# Altium PCB f446.pcbdoc (part 2 of 2)
Units mil, origin at the board's own origin, x right, y up, seen from the top; angles counter-clockwise.
Board outline 2178.76 x 2196.35 mil, 2 copper layers (Top Layer, Bottom Layer); 68 components, 82 nets, 319 pads, 182 vias.
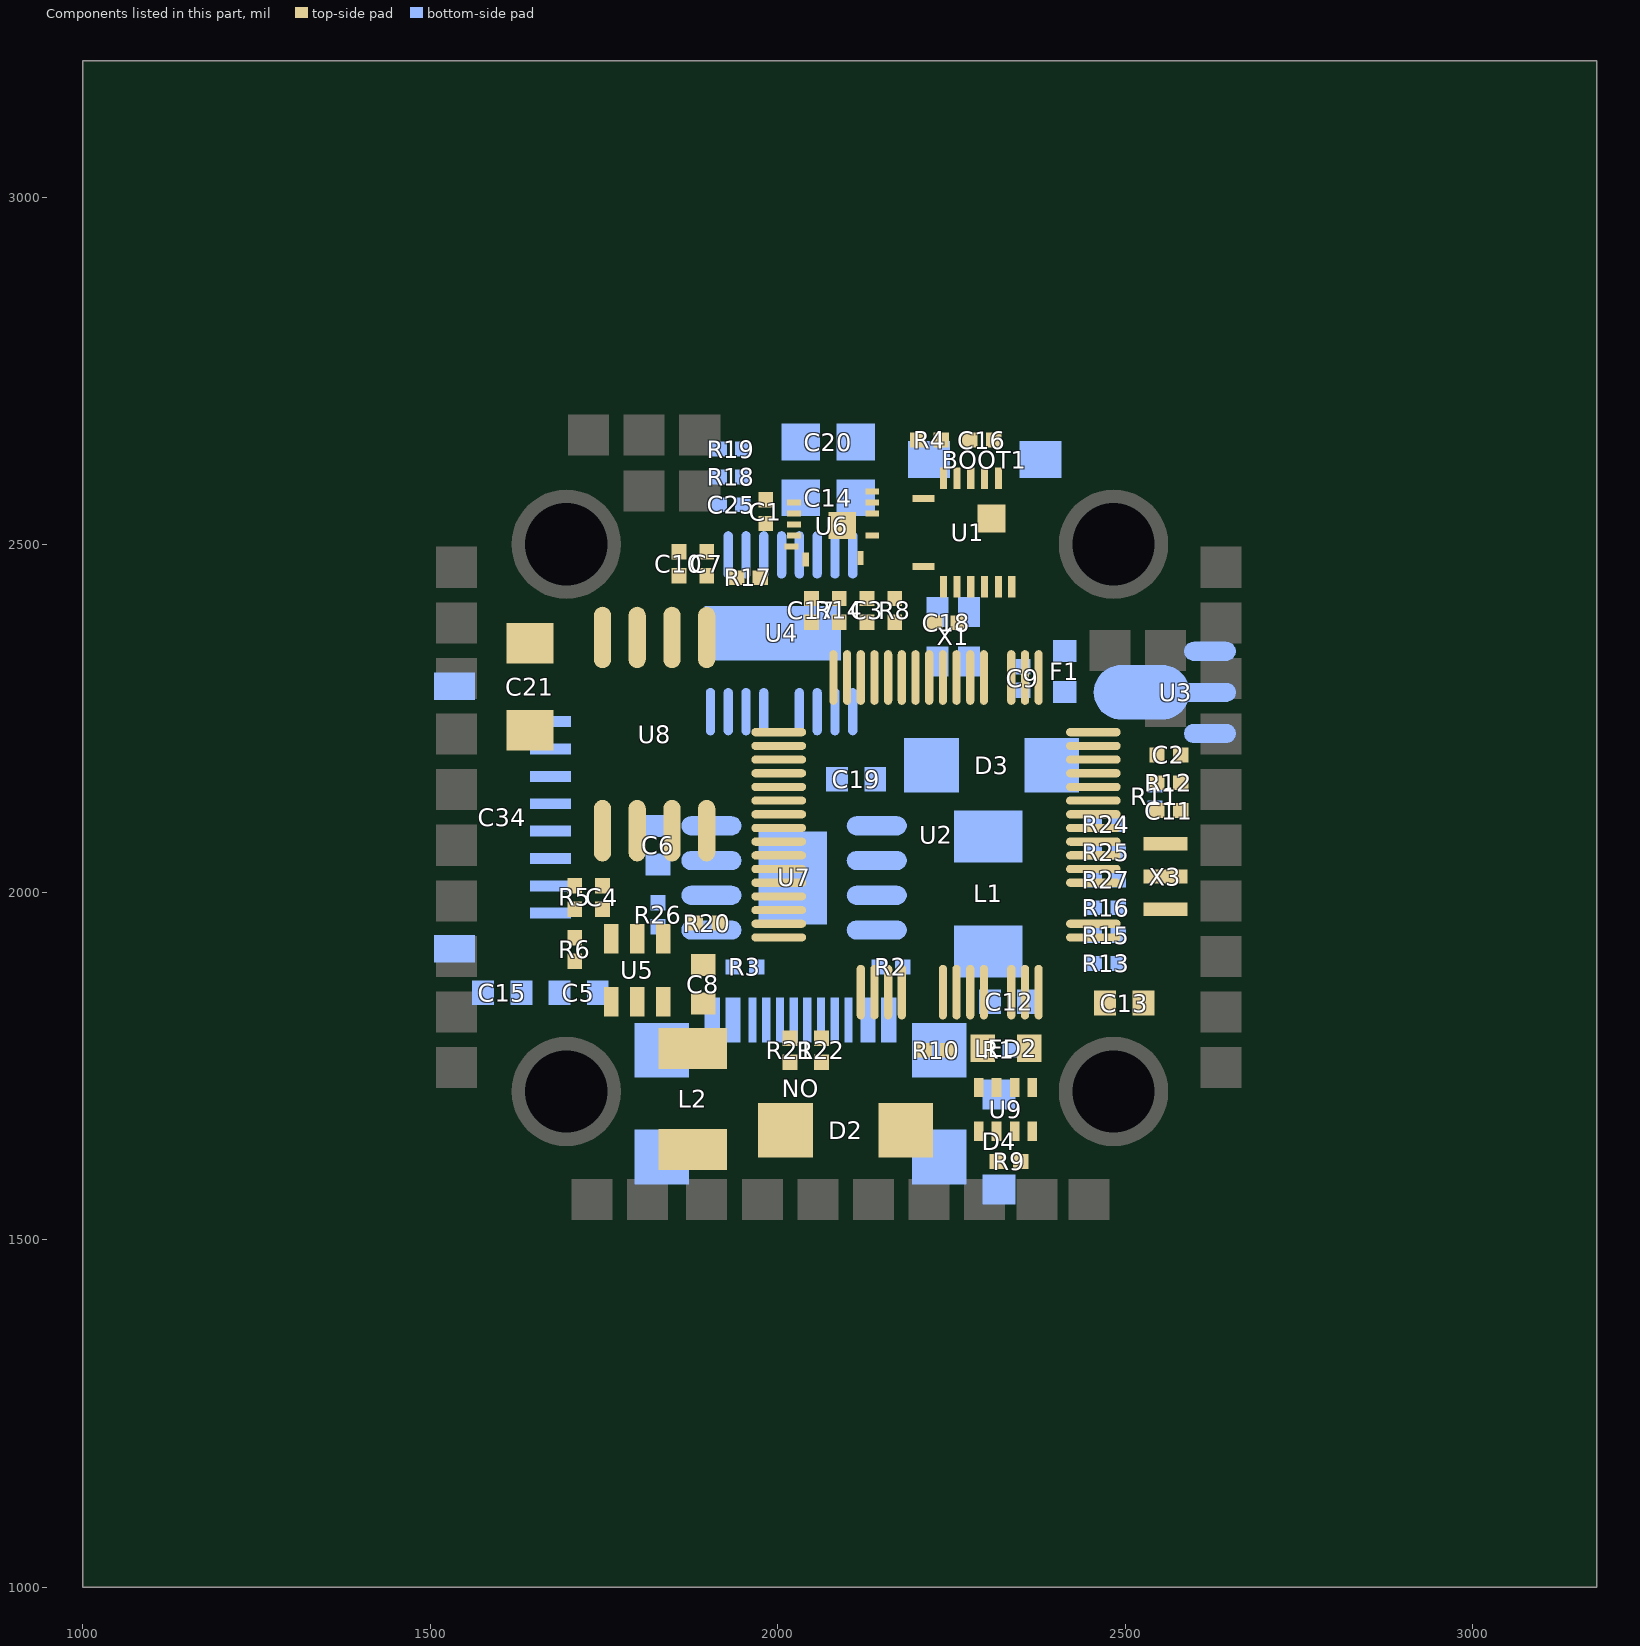
[diagram p2: the components of this part, seen from the top]

## Other copper
Top Layer:
  region net LED1: 2334.45,1783.52 2321.01,1783.52 2324.74,1789.79 2330.72,1789.79
  region net SPI_MISO1: 2284.05,2268.94 2270.64,2268.08 2273.95,2274.58 2279.93,2274.96
  region net GYRO_EXTL2: 2244.45,2248.52 2231.01,2248.52 2234.74,2254.79 2240.72,2254.79
  region net GYRO-CS2: 2224.52,2263.43 2211.09,2263.61 2214.9,2269.83 2220.88,2269.75
  region net S7: 2184.44,2258.52 2171.01,2258.53 2174.74,2262.61 2180.72,2262.6
  region net S8: 2143.65,2215.88 2143.65,2229.32 2149.92,2225.59 2149.92,2219.61
  region net GYRO_EXTL1: 2263.72,2568.2 2261.54,2554.94 2255.95,2559.59 2256.94,2565.58
  region net GYRO_EXTL2: 2172.55,2448.89 2172.55,2462.32 2166.28,2458.6 2166.28,2452.61
  region net 3V3_1: 2364.43,2613.51 2350.99,2613.51 2352.71,2619.78 2362.71,2619.78
  region net 3V3_1: 2364.44,2601.67 2351,2601.65 2352.73,2595.38 2362.73,2595.4
  region net 3V3_2: 1986.67,2443.16 1977.17,2433.66 1982.81,2430.44 1989.89,2437.51
  region net USB_DETECT: 1961.17,1966.02 1957.07,1978.81 1964.13,1977.32 1966.05,1971.34
  region net SPI_MISO1: 2167.55,2613.89 2167.55,2627.32 2161.28,2623.6 2161.28,2617.61
  region net GYRO-CS2: 2178.28,2521.54 2168.78,2512.04 2166.98,2519.11 2171.22,2523.34
  region net SPI_MOSI2: 1956.66,2308.15 1947.15,2298.66 1954.21,2296.85 1958.45,2301.08
  region net SPI_MOSI2: 1941.8,2300.88 1941.8,2314.32 1935.53,2310.59 1935.53,2304.61
  region net SPI_SCK2: 1928.29,2276.54 1918.78,2267.04 1916.99,2274.11 1921.22,2278.34
  region net S3: 1756.66,2187.04 1747.16,2196.54 1754.23,2198.34 1758.46,2194.11
  region net S2: 1778.65,2184.31 1778.64,2170.88 1784.91,2174.59 1784.92,2180.58
  region net S1: 1783.65,2159.31 1783.64,2145.88 1789.91,2149.59 1789.92,2155.58
  region net S4: 2041.8,2140.88 2041.8,2154.32 2035.53,2150.59 2035.53,2144.61
  region net U3_RX: 2099.44,1628.52 2086.01,1628.53 2089.74,1634.79 2095.72,1634.79
  region net U3_TX: 2079.44,1643.52 2066.01,1643.53 2069.74,1649.79 2075.72,1649.79
  region net S6: 1958.65,2065.88 1958.65,2079.32 1964.92,2075.59 1964.92,2069.61
  region net U1_TX: 2226.81,1955.88 2226.79,1969.31 2220.53,1965.58 2220.53,1959.59
  region net U1_RXPPM: 2206.81,1935.88 2206.79,1949.31 2200.53,1945.58 2200.53,1939.59
  region net SPI_SCK2: 1949.67,2218.25 1947.46,2205 1954.25,2207.6 1955.25,2213.58
  region net SPI_MISO2: 1955.23,2182.72 1951.63,2195.66 1958.64,2193.86 1960.3,2187.88
  region net U2_RX: 2366.66,2247.04 2357.16,2256.54 2364.23,2258.34 2368.46,2254.11
  region net VBAT+: 1666.8,2000.88 1666.8,2014.32 1660.53,2013.7 1660.53,2001.5
  region net VBAT+: 1653.65,2000.88 1653.65,2014.32 1659.92,2013.7 1659.92,2001.5
  region net VBAT+: 1641.8,2000.88 1641.8,2014.32 1635.53,2013.7 1635.53,2001.5
  region net VBAT+: 1629.44,2013.52 1616.01,2013.52 1616.62,2019.79 1628.83,2019.79
  region net VBAT+: 1628.65,2000.88 1628.65,2014.32 1634.92,2013.7 1634.92,2001.5
  region net VBAT+: 1629.44,2001.67 1616.01,2001.67 1616.62,1995.4 1628.83,1995.4
  region net S1: 1594.44,1986.67 1581.01,1986.67 1584.73,1980.4 1590.71,1980.4
  region net S6: 1594.44,2248.52 1581.01,2248.52 1584.73,2254.79 1590.71,2254.79
  region net OSDCS: 2145.09,2267.7 2131.74,2269.27 2136.16,2275.06 2142.14,2274.36
  region net VBAT+: 1629.44,2261.67 1616.01,2261.67 1616.62,2255.4 1628.83,2255.4
  region net VBAT+: 1629.44,2273.52 1616.01,2273.53 1616.63,2279.8 1628.83,2279.79
  region net VBAT+: 1629.44,2301.68 1616.01,2301.67 1616.63,2295.4 1628.83,2295.41
  region net VBAT+: 1629.44,2301.68 1616.01,2301.67 1616.63,2295.4 1628.83,2295.41
  region net VBAT+: 1629.44,2293.52 1616.01,2293.53 1616.63,2299.8 1628.83,2299.79
  region net VBAT+: 1629.44,2293.52 1616.01,2293.53 1616.63,2299.8 1628.83,2299.79
  region net VBAT+: 1629.44,2281.68 1616.01,2281.67 1616.63,2275.4 1628.83,2275.41
  region net ADC_BAT: 2543.29,2143.66 2533.78,2153.16 2531.99,2146.09 2536.22,2141.86
  region net C4_1: 1734.42,2026.65 1720.99,2026.7 1724.69,2020.41 1730.68,2020.4
  region net ADC_CURRENT: 2408.74,2099.24 2408.56,2085.8 2414.88,2089.45 2414.96,2095.43
  region net GYRO-CS1: 2384.43,2111.67 2371,2111.68 2374.72,2105.41 2380.7,2105.4
  region net GYRO_EXTL1: 2349.44,2126.68 2336.01,2126.67 2339.74,2120.4 2345.72,2120.41
  region net ADC-RSSI1: 2514.04,2141.67 2504.54,2151.17 2502.74,2144.1 2506.97,2139.87
  region net U1_TX: 2622.27,1963.88 2614.09,1974.54 2621.32,1975.42 2624.99,1970.64
  region net 3V3_1: 2364.44,2416.68 2351.01,2416.67 2352.73,2410.4 2362.73,2410.41
  region net 3V3_1: 2364.44,2428.52 2351.01,2428.53 2352.73,2434.8 2362.73,2434.79
  region net 3V3_1: 2358.28,2393.66 2348.78,2403.16 2345.57,2397.51 2352.64,2390.44
  region net 3V3_1: 2364.44,2408.52 2351.01,2408.53 2352.73,2414.8 2362.73,2414.79
  region net VBAT+: 1791.8,1835.64 1791.8,1849.08 1785.53,1848.46 1785.53,1836.26
  region net 3V3_2: 1881.8,2445.88 1881.8,2459.32 1875.53,2457.6 1875.53,2447.6
  region net 3V3_2: 1863.65,2445.88 1863.65,2459.32 1869.92,2457.6 1869.92,2447.6
  region net 3V3_2: 1851.8,2445.88 1851.8,2459.32 1845.53,2457.6 1845.53,2447.6
  region net R4_2: 2303.32,1965.31 2289.89,1965.31 2293.61,1959.04 2299.6,1959.04
  region net 3V3_1: 2103.65,1905.88 2103.65,1919.32 2109.92,1917.6 2109.92,1907.6
  region net 3V3_2: 2010.19,2311.53 1996.76,2311.53 1998.48,2317.8 2008.48,2317.8
  region net C16_1: 2270.25,2639.98 2285.21,2639.98 2280.72,2631 2274.74,2631
  region net 3V3_2: 1887.09,2444.42 1887.09,2465.1 1872.09,2457.6 1872.09,2447.6
  region net SCL: 2236.68,1587.13 2247.25,1576.54 2250.42,1586.06 2246.19,1590.3
  region net SDA: 2290.24,1587.13 2305.2,1587.13 2300.72,1594.63 2294.73,1594.63
  region net U5_TX: 2076.67,1587.13 2087.25,1576.55 2090.42,1586.07 2086.19,1590.3
  region net U5_RX: 2125.23,1587.13 2140.19,1587.13 2135.7,1596.1 2129.72,1596.1
  region net U2_RX: 2608.2,2460.11 2608.2,2475.07 2599.22,2470.58 2599.22,2464.59
  region net U2_TX: 2608.2,2385.11 2608.2,2400.07 2599.22,2395.58 2599.22,2389.59
  region net U4_RX: 2538.77,2318.07 2528.19,2328.65 2525.02,2319.13 2529.25,2314.9
  region net U4_TX: 2538.77,2238.07 2528.19,2248.65 2525.02,2239.13 2529.25,2234.9
  region net S1: 1567.25,1936.86 1567.25,1921.9 1576.23,1934.13 1576.23,1942.59
  region net S6: 1567.25,2294.31 1567.25,2279.35 1576.23,2273.63 1576.23,2282.09
  region net C4_1: 1971.74,1618.23 1971.74,1645.02 1953.43,1635.87 1953.43,1623.66
  region net U2_47: 1926.65,1963.72 1919.18,1944.98 1929.7,1938.68 1932.96,1946.84
  region net C4_1: 1718.35,2017.12 1718.35,2002.16 1727.33,2006.65 1727.33,2012.63
  region net C4_2: 1718.35,1968.08 1718.35,1983.04 1727.33,1978.55 1727.33,1972.57
  region net C4_2: 1700.25,1964.42 1715.21,1964.42 1710.72,1955.45 1704.74,1955.45
  region net C4_2: 1700.25,1945.77 1715.21,1945.77 1710.72,1954.75 1704.74,1954.75
  region net C4_2: 1758.35,1976.19 1749.12,1964.42 1757.93,1961.12 1761.66,1965.86
  region net C4_2: 1737.09,1968.08 1737.09,1983.04 1728.12,1978.55 1728.12,1972.57
  region net C4_1: 1737.09,2017.12 1737.09,2002.16 1728.12,2006.65 1728.12,2012.63
  region net 3V3_1: 2338.63,1623.23 2360.9,1623.23 2354.77,1627.6 2344.77,1627.6
  region net SDA: 2316.32,1601.97 2304.55,1611.21 2301.25,1602.39 2305.99,1598.67
  region net SDA: 2323.17,1623.23 2308.21,1623.23 2312.7,1632.21 2318.68,1632.21
  region net 3V3_1: 2199.55,1783.23 2221.82,1783.23 2215.68,1798.23 2205.68,1798.23
  region net SCL: 2237.29,1761.97 2252.25,1761.97 2247.76,1752.99 2241.78,1752.99
  region net SCL: 2252.25,1783.23 2237.29,1783.23 2241.78,1792.21 2247.76,1792.21
  region net 3V3_1: 2333.82,1669.88 2347.62,1669.88 2345.73,1674.59 2335.73,1674.59
  region net 3V3_1: 2347.62,1642.32 2333.82,1642.32 2335.73,1636.64 2345.73,1636.64
  region net SDA: 2321.62,1642.32 2308.21,1642.32 2312.7,1633.34 2318.68,1633.34
  region net SDA: 2307.82,1669.88 2321.62,1669.88 2317.7,1675.59 2311.72,1675.59
  region net SCL: 2296.02,1642.32 2282.22,1642.32 2286.14,1633.34 2292.12,1633.34
  region net SCL: 2282.22,1656.03 2287.88,1669.88 2280.07,1674.49 2277.61,1668.48
  region net 3V3_1: 2373.22,1705.32 2359.42,1705.32 2361.33,1700.19 2371.33,1700.19
  region net 3V3_1: 2359.42,1732.88 2373.22,1715.77 2379.31,1732.12 2372.99,1739.94
  region net 3V3_1: 2321.62,1705.32 2307.82,1705.32 2309.73,1700.59 2319.73,1700.59
  region net 3V3_1: 2033.42,2565.02 2013.54,2565.02 2018.48,2575.61 2028.48,2575.61
  region net SPI_MISO1: 2033.42,2540.45 2033.42,2549.27 2037.73,2547.85 2037.73,2541.87
  region net U6_10: 2013.54,2533.52 2013.54,2524.71 2004.56,2526.13 2004.56,2532.11
  region net GYRO_EXTL2: 2029.5,2493.21 2029.5,2502.03 2038.48,2500.61 2038.48,2494.63
  region net 3V3_1: 2035.9,2488.78 2035.9,2468.89 2020.9,2473.84 2020.9,2483.84
  region net GYRO-CS2: 2145.83,2549.27 2145.48,2540.45 2154.13,2531.96 2154.45,2540.1
  region net SPI_SCK1: 2145.83,2556.2 2145.83,2565.02 2154.71,2563.58 2154.71,2557.6
  region net SPI_MOSI1: 2145.83,2571.95 2145.83,2580.77 2154.8,2579.38 2154.8,2573.4
  region net C16_1: 2272.62,2611.15 2282.82,2611.15 2280.72,2620.13 2274.74,2620.13
  region net GYRO_EXTL1: 2243.82,2580.05 2233.62,2580.05 2235.72,2576.59 2241.7,2576.59
  region net C18_1: 2262.82,2424.05 2252.62,2424.05 2254.74,2415.07 2260.72,2415.07
  region net SPI_SCK1: 2322.82,2424.05 2312.62,2424.05 2314.72,2415.07 2320.7,2415.07
  region net SPI_SCK1: 2312.62,2451.48 2322.82,2455.15 2313.27,2461.25 2307.05,2459.02
  region net SPI_MOSI1: 2341.82,2424.05 2331.62,2424.05 2333.72,2415.07 2339.7,2415.07
  region net SPI_MOSI1: 2331.62,2453.79 2341.82,2455.15 2331.68,2462.85 2324.21,2461.85
  region net 3V3_2: 1985.9,2441.97 1965.86,2441.97 1986.29,2426.97 2000.43,2426.97
  region net U6_10: 1993.35,2536.6 1993.35,2521.64 2002.33,2526.13 2002.33,2532.11
  region net 3V3_1: 2550,2186.97 2534.55,2199.94 2530.18,2187.81 2536.38,2182.6
  region net C18_1: 2265.21,2398.23 2250.25,2398.23 2254.74,2407.21 2260.72,2407.21
  region net U2_31: 2099.11,2389.21 2089.88,2377.43 2097.66,2375.16 2101.64,2379.65
  region net ADC_BAT: 2549.07,2146.97 2534.55,2150.57 2528.68,2142.78 2535.46,2141.1
  region net C11_1: 2546.29,2106.97 2534.55,2116.24 2531.25,2107.4 2535.98,2103.67
  region net 3V3_1: 2037.85,2377.43 2037.85,2399.7 2030.52,2393.57 2030.52,2383.57
  region net 3V3_1: 2059.11,2396.35 2042.76,2377.43 2057.93,2372.05 2064.49,2379.64
  region net USB_DP: 2010.25,1800.77 2025.21,1800.77 2020.72,1809.75 2014.74,1809.75
  region net USB_DM: 2055.23,1800.77 2070.19,1800.77 2065.7,1809.75 2059.72,1809.75
  region net C8_2: 1875.01,1887.68 1875.01,1902.64 1866.03,1898.15 1866.03,1892.17
  region net C8_1: 1907.98,1824.29 1877.47,1824.29 1886.63,1805.98 1898.83,1805.98
  region net C8_1: 1875.01,1824.78 1875.01,1855.29 1856.7,1846.14 1856.7,1833.94
  region net C8_2: 1845.59,1916.76 1831.5,1911.74 1844.32,1906.77 1850.56,1908.99
  region net C4_2: 1752.85,1953.94 1767.81,1953.94 1763.32,1962.92 1757.34,1962.92
  region net VBAT+: 1749.85,1827.13 1749.85,1857.64 1731.54,1848.54 1731.54,1836.34
  region net VBAT+: 1770.79,1857.61 1770.79,1827.1 1789.1,1836.26 1789.1,1848.46
  region net VBAT+: 1787.25,1827.1 1787.25,1857.61 1768.94,1848.46 1768.94,1836.26
  region net C8_1: 1845.59,1855.29 1845.59,1824.78 1863.9,1833.94 1863.9,1846.14
  region net C8_1: 1877.47,1804.96 1907.98,1804.96 1898.83,1823.27 1886.63,1823.27
  region net C4_1: 1926.94,1645.02 1926.94,1614.51 1945.24,1623.66 1945.24,1635.87
  region net X3_1: 2541.17,2059.95 2526.23,2060.66 2517.95,2052.06 2526.04,2051.68
  region net X3_3: 2526.23,1984.49 2541.17,1985.24 2526.06,1993.47 2518,1993.07
  region net 3V3_2: 1868.35,2444.42 1868.35,2465.1 1883.35,2457.6 1883.35,2447.6
  region net 3V3_2: 1847.09,2465.1 1847.09,2444.42 1832.09,2447.6 1832.09,2457.6
  region net 3V3_1: 2381.27,1889.67 2369.46,1889.71 2370.41,1904.71 2380.41,1904.68
  region net 3V3_1: 2381.27,1839.06 2373.36,1817.21 2383.18,1810.1 2388,1819.42
  region net LED1: 2341.9,1822.76 2330.09,1822.76 2333.01,1813.79 2338.99,1813.79
  region net R4_2: 2302.53,1889.71 2290.72,1889.68 2293.61,1898.66 2299.6,1898.67
  region net SDA: 2282.84,1822.73 2271.03,1822.79 2273.92,1816.8 2279.9,1816.77
  region net SCL: 2262.85,1820.87 2251.66,1824.65 2251.22,1815.33 2257.55,1813.19
  region net U5_RX: 2184.42,1822.76 2172.61,1822.77 2175.52,1813.79 2181.5,1813.78
  region net U5_TX: 2164.73,1822.75 2152.92,1822.78 2155.81,1813.79 2161.8,1813.78
  region net U3_RX: 2145.05,1822.76 2133.24,1822.76 2136.16,1813.79 2142.14,1813.79
  region net U3_TX: 2125.25,1821.62 2113.66,1823.9 2114.73,1814.55 2120.72,1813.37
  region net U2_47: 1970.55,1949.37 1965.24,1959.92 1955.17,1953.01 1958.99,1945.41
  region net USB_DETECT: 1967.89,1968.42 1967.89,1980.23 1958.92,1977.32 1958.92,1971.34
  region net USB_DP: 2034.82,1988.11 2034.82,1999.92 2041.3,1997.01 2041.3,1991.03
  region net USB_DM: 2034.83,2019.6 2034.82,2007.79 2043.8,2010.7 2043.8,2016.68
  region net U1_RXPPM: 2034.82,2027.48 2034.82,2039.29 2043.8,2036.38 2043.8,2030.4
  region net U1_TX: 2034.84,2047.16 2034.81,2058.97 2043.79,2056.08 2043.81,2050.1
  region net S6: 1968,2066.85 1967.79,2078.66 1958.87,2075.59 1958.97,2069.61
  region net S1: 1967.93,2086.53 1967.86,2098.34 1958.9,2095.38 1958.93,2089.4
  region net S2: 1967.92,2106.22 1967.87,2118.03 1958.9,2115.08 1958.93,2109.1
  region net S3: 1967.91,2125.9 1967.88,2137.71 1958.91,2134.78 1958.92,2128.8
  region net SPI_MOSI2: 2034.83,2165.27 2034.82,2177.08 2043.8,2174.18 2043.8,2168.2
  region net SPI_MISO2: 1967.89,2184.96 1967.89,2196.77 1958.92,2193.86 1958.92,2187.88
  region net SPI_SCK2: 1967.92,2216.45 1967.87,2204.64 1958.9,2207.6 1958.93,2213.58
  region net FLASH_CS: 1967.89,2224.33 1967.89,2236.14 1958.92,2233.23 1958.92,2227.25
  region net 3V3_1: 2085.99,2342.43 2074.18,2342.44 2075.11,2356.95 2085.11,2356.94
  region net U2_31: 2105.68,2342.43 2093.87,2342.43 2096.79,2351.41 2102.77,2351.41
  region net C3_1: 2125.36,2342.43 2113.55,2342.43 2116.47,2351.41 2122.45,2351.41
  region net OSDCS: 2145.05,2275.5 2133.24,2275.5 2136.16,2266.53 2142.14,2266.53
  region net U2_28: 2164.73,2342.43 2152.92,2342.43 2155.84,2351.41 2161.82,2351.41
  region net S7: 2184.42,2275.5 2172.61,2275.5 2175.53,2266.53 2181.51,2266.53
  region net S8: 2204.1,2275.5 2192.29,2275.5 2195.21,2266.53 2201.19,2266.53
  region net GYRO-CS2: 2223.79,2275.5 2211.98,2275.5 2214.9,2266.53 2220.88,2266.53
  region net GYRO_EXTL2: 2243.47,2275.61 2231.66,2275.4 2234.74,2266.47 2240.72,2266.58
  region net SPI_MOSI1: 2263.16,2275.53 2251.35,2275.47 2254.32,2266.51 2260.3,2266.54
  region net SPI_MISO1: 2282.84,2275.5 2271.03,2275.5 2273.95,2266.53 2279.93,2266.53
  region net SPI_SCK1: 2302.53,2342.45 2290.72,2342.42 2293.61,2351.4 2299.6,2351.42
  region net 3V3_1: 2341.9,2275.51 2330.09,2275.5 2331.01,2260.5 2341.01,2260.51
  region net 3V3_1: 2341.9,2342.43 2330.09,2342.44 2331.01,2357.44 2341.01,2357.43
  region net U2_RX: 2381.27,2275.5 2369.46,2275.5 2372.37,2266.53 2378.36,2266.53
  region net U2_RX: 2381.27,2342.41 2369.46,2342.46 2372.42,2351.42 2378.4,2351.4
  region net U2_TX: 2422.59,2235.81 2418.68,2224.67 2411.07,2230.08 2413.26,2236.34
  region net U4_RX: 2487.59,2204.64 2487.54,2216.45 2496.53,2213.58 2496.55,2207.6
  region net U4_TX: 2487.57,2184.96 2487.55,2196.77 2496.53,2193.88 2496.54,2187.9
  region net 3V3_1: 2487.56,2165.27 2487.56,2177.08 2499.67,2175.21 2499.67,2167.14
  region net 3V3_1: 2420.64,2177.08 2420.63,2165.27 2405.63,2166.19 2405.64,2176.19
  region net ADC-RSSI1: 2487.56,2125.9 2487.56,2137.71 2494.68,2134.8 2494.68,2128.82
  region net ADC_BAT: 2487.59,2118.03 2487.54,2106.22 2496.53,2109.1 2496.55,2115.08
  region net ADC_CURRENT: 2420.63,2086.53 2420.63,2098.34 2411.66,2095.43 2411.66,2089.45
  region net GYRO-CS1: 2420.65,2078.66 2420.61,2066.85 2411.65,2069.79 2411.67,2075.78
  region net C11_1: 2487.56,2047.16 2487.56,2058.97 2496.54,2056.06 2496.54,2050.08
  region net X3_1: 2487.56,2027.48 2487.56,2039.29 2496.54,2036.38 2496.54,2030.4
  region net X3_3: 2487.57,2019.6 2487.56,2007.79 2496.53,2010.7 2496.54,2016.68
  region net GYRO_EXTL1: 2420.63,1948.74 2420.63,1960.55 2411.66,1957.64 2411.66,1951.66
  region net 3V3_1: 2420.65,1940.86 2420.62,1929.05 2405.62,1929.99 2405.64,1939.99
  region net FLASH_CS: 1755.2,2130.4 1740.24,2130.4 1744.73,2139.38 1750.71,2139.38
  region net 3V3_2: 1744.06,2410.32 1760.12,2391.16 1765.65,2408.46 1759.45,2416.4
  region net SPI_SCK2: 1860.12,2342.68 1858.07,2327.86 1869.1,2321.99 1869.1,2330.46
  region net SPI_MOSI2: 1910.12,2337 1903.37,2323.65 1915.33,2315.76 1916.65,2322.9
Mid-Layer 1:
  region net R4_2: 2240.2,2634.68 2226.76,2634.68 2229.44,2628.41 2237.51,2628.41
  region net GYRO_EXTL2: 2244.45,2248.52 2231.01,2248.52 2233.69,2254.79 2241.76,2254.79
  region net GYRO-CS2: 2224.45,2263.52 2211.01,2263.52 2213.69,2269.79 2221.76,2269.79
  region net S7: 2178.29,2243.66 2168.78,2253.16 2166.25,2246.83 2171.96,2241.12
  region net S8: 2131.8,2215.88 2131.8,2229.32 2125.53,2226.63 2125.53,2218.56
  region net GYRO_EXTL1: 2277.42,2561.17 2267.92,2551.67 2274.25,2549.13 2279.95,2554.84
  region net GYRO-CS1: 2331.67,2588.14 2322.15,2578.66 2328.48,2576.11 2334.19,2581.81
  region net GYRO_EXTL2: 2187.42,2456.17 2177.92,2446.67 2184.25,2444.13 2189.95,2449.84
  region net USB_DETECT: 1976.48,1898.53 1963.05,1898.53 1965.73,1904.8 1973.8,1904.8
  region net USB_DETECT: 1960.19,1964.68 1946.76,1964.68 1949.44,1958.41 1957.51,1958.41
  region net GYRO-CS2: 2178.29,2521.54 2168.78,2512.04 2166.25,2518.37 2171.96,2524.08
  region net S4: 1706.66,2167.04 1697.16,2176.54 1703.49,2179.08 1709.2,2173.37
  region net S4: 2041.8,2140.88 2041.8,2154.32 2035.53,2151.63 2035.53,2143.56
  region net S6: 1946.8,2065.88 1946.8,2079.32 1940.53,2076.63 1940.53,2068.56
  region net S5: 2233.28,1891.54 2223.78,1882.04 2221.25,1888.37 2226.95,1894.08
  region net U1_TX: 2241.66,1963.15 2232.15,1953.66 2238.47,1951.11 2244.19,1956.81
  region net U1_RXPPM: 2221.66,1943.16 2212.16,1933.66 2218.5,1931.12 2224.2,1936.83
  region net U2_RX: 1708.65,2254.31 1708.64,2240.88 1714.91,2243.55 1714.92,2251.62
  region net S8: 1544.44,2441.68 1531.01,2441.67 1533.69,2435.4 1541.76,2435.41
  region net S7: 1571.66,2408.16 1562.16,2398.66 1568.5,2396.12 1574.2,2401.83
  region net S6: 1594.44,2236.68 1581.01,2236.67 1583.69,2230.4 1591.76,2230.41
  region net S5: 1566.66,2208.16 1557.16,2198.66 1563.5,2196.12 1569.2,2201.83
  region net GYRO-CS1: 2384.43,2123.53 2371,2123.52 2373.67,2129.79 2381.74,2129.8
  region net GYRO_EXTL1: 2349.44,2138.52 2336.01,2138.53 2338.69,2144.8 2346.76,2144.79
  region net R4_2: 2306.66,2172.04 2297.16,2181.54 2303.5,2184.07 2309.2,2178.37
  region net U2_RX: 2281.8,2195.88 2281.8,2209.32 2275.53,2206.63 2275.53,2198.56
  region net ADC-RSSI1: 2520.2,2156.53 2506.76,2156.53 2509.44,2162.8 2517.52,2162.8
  region net ADC-RSSI1: 2511.66,2348.16 2502.16,2338.66 2508.49,2336.12 2514.2,2341.83
  region net U1_TX: 2614.07,1956.67 2604.54,1966.14 2602.02,1959.81 2607.74,1954.11
  region net U1_RXPPM: 2612.56,1913.89 2612.56,1927.32 2606.29,1924.64 2606.29,1916.57
  region net VBAT+: 2537.56,1893.88 2537.55,1907.32 2531.28,1904.63 2531.29,1896.56
  region net VBAT+: 1803.67,1835.65 1803.63,1849.09 1809.91,1846.42 1809.93,1838.35
Mid-Layer 2:
  region net SPI_MISO1: 2283.65,2255.88 2283.65,2269.32 2289.92,2266.63 2289.92,2258.56
  region net SPI_MISO1: 2298.29,2581.54 2288.79,2572.04 2286.25,2578.37 2291.96,2584.08
  region net SPI_MISO1: 2304.45,2566.67 2291.01,2566.67 2293.69,2560.4 2301.76,2560.4
  region net SPI_MISO1: 2179.4,2613.89 2179.4,2627.32 2185.67,2624.64 2185.67,2616.57
  region net U2_RX: 2358.29,2238.66 2348.78,2248.16 2346.25,2241.83 2351.96,2236.12
  region net OSDCS: 1985.88,2260.66 1982.56,2247.64 1989.27,2248.56 1991.32,2256.63
  region net OSDCS: 2138.28,2253.66 2128.78,2263.16 2126.25,2256.83 2131.95,2251.12
  region net R4_2: 2303.87,2166.08 2290.49,2167.31 2292.57,2160.83 2300.64,2160.09
  region net U2_RX: 2293.65,2195.88 2293.65,2209.32 2299.92,2206.63 2299.92,2198.56
  region net R4_2: 2303.32,1977.16 2289.89,1977.16 2292.57,1983.43 2300.64,1983.43
Bottom Layer:
  region net 3V3_1: 2364.8,2613.06 2351.39,2613.94 2353.51,2620.08 2363.51,2619.43
  region net 3V3_1: 2364.8,2602.12 2351.39,2601.23 2353.51,2595.09 2363.51,2595.75
  region net 3V3_2: 1978.29,2433.66 1968.79,2443.16 1965.57,2437.51 1972.64,2430.44
  region net 3V3_2: 1986.67,2443.16 1977.17,2433.66 1982.81,2430.44 1989.89,2437.51
  region net 3V3_2: 1985.4,2447.22 1972.18,2449.63 1974.92,2455.51 1984.92,2453.68
  region net R22_1: 2063.28,1761.54 2053.78,1752.04 2051.98,1759.11 2056.22,1763.34
  region net R21_1: 2013.28,1761.54 2003.78,1752.04 2001.98,1759.11 2006.22,1763.34
  region net +5V: 2346.96,1565.74 2346.64,1579.17 2340.39,1578.41 2340.68,1566.21
  region net +5V: 2358.65,1565.88 2358.65,1579.32 2364.92,1578.7 2364.92,1566.5
  region net +5V: 2384.44,1578.52 2371.01,1578.52 2371.62,1584.79 2383.83,1584.79
  region net +5V: 2371.8,1565.88 2371.8,1579.32 2365.53,1578.7 2365.53,1566.5
  region net +5V: 2188.65,1675.88 2188.65,1689.32 2194.92,1688.7 2194.92,1676.5
  region net +5V: 2176.8,1675.88 2176.8,1689.32 2170.53,1688.7 2170.53,1676.5
  region net +5V: 2213.65,1675.88 2213.65,1689.32 2219.92,1688.7 2219.92,1676.5
  region net +5V: 2201.8,1675.88 2201.8,1689.32 2195.53,1688.7 2195.53,1676.5
  region net +5V: 2151.8,1675.88 2151.8,1689.32 2145.53,1688.7 2145.53,1676.5
  region net +5V: 2163.65,1675.88 2163.65,1689.32 2169.92,1688.7 2169.92,1676.5
  region net +5V: 1926.66,1582.04 1917.16,1591.54 1922.03,1595.54 1930.66,1586.91
  region net +5V: 1911.8,1575.88 1911.8,1589.32 1905.53,1588.7 1905.53,1576.5
  region net +5V: 1903.65,1575.88 1903.65,1589.32 1909.92,1588.7 1909.92,1576.5
  region net SPI_MOSI2: 1947.16,2298.66 1956.66,2308.16 1956.44,2303.11 1952.21,2298.88
  region net SPI_SCK2: 1934.91,2262.25 1921.52,2261.14 1925.75,2255.2 1931.73,2255.7
  region net S3: 1748.29,2178.66 1738.78,2188.16 1736.99,2181.09 1741.22,2176.86
  region net S2: 1773.29,2168.66 1763.78,2178.16 1761.99,2171.09 1766.22,2166.86
  region net S1: 1778.28,2143.66 1768.78,2153.16 1766.98,2146.09 1771.21,2141.86
  region net U3_RX: 2093.28,1613.66 2083.78,1623.16 2081.98,1616.09 2086.22,1611.86
  region net U3_TX: 2073.28,1628.66 2063.78,1638.16 2061.98,1631.09 2066.22,1626.86
  region net U3_TX: 1758.65,1550.88 1758.65,1564.32 1764.92,1560.59 1764.92,1554.61
  region net U3_RX: 1833.65,1535.88 1833.65,1549.32 1839.92,1545.59 1839.92,1539.61
  region net SPI_SCK2: 1943.29,2221.54 1933.78,2212.04 1931.99,2219.11 1936.22,2223.34
  region net SPI_MISO2: 1941.8,2180.88 1941.8,2194.32 1935.53,2190.59 1935.53,2184.61
  region net SPI_MISO2: 1806.67,2127.1 1797.1,2136.53 1804.15,2138.38 1808.42,2134.18
  region net VBAT+: 1666.8,2000.88 1666.8,2014.32 1660.53,2013.7 1660.53,2001.5
  region net VBAT+: 1678.65,2000.88 1678.65,2014.32 1684.92,2013.7 1684.92,2001.5
  region net VBAT+: 1641.8,2000.88 1641.8,2014.32 1635.53,2013.7 1635.53,2001.5
  region net VBAT+: 1653.65,2000.88 1653.65,2014.32 1659.92,2013.7 1659.92,2001.5
  region net VBAT+: 1628.65,2000.88 1628.65,2014.32 1634.92,2013.7 1634.92,2001.5
  region net S1: 1594.44,1998.52 1581.01,1998.52 1584.73,2004.79 1590.71,2004.79
  region net S2: 1571.66,2012.04 1562.16,2021.54 1569.23,2023.34 1573.46,2019.11
  region net S3: 1563.65,2094.31 1563.64,2080.88 1569.91,2084.59 1569.92,2090.58
  region net S4: 1563.65,2134.31 1563.64,2120.88 1569.91,2124.59 1569.92,2130.58
  region net VBAT+: 1794.44,2651.67 1781.01,2651.67 1781.62,2645.4 1793.83,2645.4
  region net VBAT+: 1796.66,2638.15 1787.15,2628.66 1792.01,2624.65 1800.65,2633.27
  region net VBAT+: 1794.44,2643.52 1781.01,2643.52 1781.62,2649.79 1793.83,2649.79
  region net VBAT+: 1629.44,2273.52 1616.01,2273.53 1616.63,2279.8 1628.83,2279.79
  region net VBAT+: 1631.66,2307.04 1622.16,2316.54 1627.03,2320.54 1635.66,2311.9
  region net VBAT+: 1629.44,2301.68 1616.01,2301.67 1616.63,2295.4 1628.83,2295.41
  region net VBAT+: 1629.44,2293.52 1616.01,2293.53 1616.63,2299.8 1628.83,2299.79
  region net VBAT+: 1629.44,2281.68 1616.01,2281.67 1616.63,2275.4 1628.83,2275.41
  region net 3V3_1: 2364.44,2416.67 2351.01,2416.67 2352.72,2410.4 2362.72,2410.4
  region net 3V3_1: 2364.44,2408.52 2351.01,2408.52 2352.72,2414.79 2362.72,2414.79
  region net 3V3_1: 2366.66,2403.13 2357.13,2393.66 2362.77,2390.42 2369.87,2397.47
  region net VBAT+: 2550.2,1906.53 2536.76,1906.53 2539.44,1912.8 2547.52,1912.8
  region net 3V3_2: 1896.66,2453.16 1887.16,2443.66 1892.81,2440.44 1899.88,2447.51
  region net 3V3_2: 1881.8,2445.88 1881.8,2459.32 1875.53,2457.6 1875.53,2447.6
  region net 3V3_2: 1863.65,2445.88 1863.65,2459.32 1869.92,2457.6 1869.92,2447.6
  region net 3V3_1: 2021.66,1928.16 2012.16,1918.66 2017.81,1915.44 2024.88,1922.51
  region net 3V3_1: 2091.8,1905.88 2091.8,1919.32 2085.53,1917.6 2085.53,1907.6
  region net 3V3_1: 2217.42,2571.17 2207.92,2561.67 2213.57,2558.45 2220.64,2565.53
  region net 3V3_2: 2010.19,2299.68 1996.76,2299.68 1998.48,2293.41 2008.48,2293.41
  region net +5V: 2635.2,2079.68 2621.76,2079.68 2622.38,2073.41 2634.58,2073.41
  region net +5V: 2635.2,2091.53 2621.76,2091.53 2622.38,2097.8 2634.58,2097.8
  region net +5V: 2635.2,2049.68 2621.76,2049.68 2622.38,2043.41 2634.58,2043.41
  region net +5V: 2635.2,2061.53 2621.76,2061.53 2622.38,2067.8 2634.58,2067.8
  region net R2_2: 2134.55,1900.08 2134.55,1885.12 2125.57,1889.61 2125.57,1895.59
  region net D4_2: 2294.85,1716.4 2294.85,1701.44 2285.88,1705.93 2285.88,1711.91
  region net +5V: 2342.1,1557.05 2342.1,1587.56 2352.43,1578.41 2352.43,1566.21
  region net +5V: 2333.73,1593.96 2303.22,1593.96 2312.37,1612.26 2324.58,1612.26
  region net R19_1: 2040.83,2594.17 2025.87,2594.17 2030.36,2603.15 2036.34,2603.15
  region net U4_25: 2097.38,2541.02 2084.34,2548.36 2080.49,2540.22 2085.91,2537.18
  region net R19_1: 2025.87,2621.02 2040.83,2621.02 2036.34,2612.05 2030.36,2612.05
  region net R19_1: 2005.6,2645.08 2005.6,2630.12 1996.62,2634.61 1996.62,2640.59
  region net U4_26: 2139.85,2628.39 2126.83,2621.02 2138.28,2617.19 2143.68,2620.24
  region net 3V3_1: 2347.72,2595.83 2371.01,2595.83 2363.51,2585.59 2353.51,2585.59
  region net VBAT+: 2532.09,2109.42 2553.35,2109.42 2548.83,2091.12 2536.63,2091.12
  region net C19_2: 2253.51,2095.53 2253.51,2065.02 2235.2,2074.17 2235.2,2086.38
  region net +9V: 2351.94,1897.34 2351.94,1927.85 2367.72,1918.7 2367.72,1906.5
  region net +9V: 2287.47,1877.52 2317.98,1877.52 2308.83,1859.21 2296.63,1859.21
  region net U7_6: 1825.41,1995.77 1838.35,1980.29 1841.29,1992.49 1835.83,1998.45
  region net 3V3_2: 2363.35,2300.44 2363.35,2279.42 2378.35,2282.94 2378.35,2292.94
  region net VBAT+: 1643.19,2017.04 1643.19,2001.29 1624.89,2001.5 1624.89,2013.7
  region net VBAT+: 1702.25,2001.29 1702.25,2017.04 1720.56,2013.7 1720.56,2001.5
  region net S1: 1643.19,2056.02 1643.19,2041.06 1634.22,2045.55 1634.22,2051.53
  region net S1: 1702.25,2041.11 1702.25,2056.07 1711.23,2051.58 1711.23,2045.6
  region net S2: 1643.19,2095.39 1643.19,2080.43 1638.03,2084.92 1638.03,2090.9
  region net S2: 1702.25,2080.43 1702.25,2095.39 1711.23,2090.9 1711.23,2084.92
  region net S3: 1656.46,2119.4 1643.19,2126.31 1639.18,2118.28 1644.74,2115.39
  region net S3: 1702.25,2119.8 1702.25,2134.76 1707.4,2130.27 1707.4,2124.29
  region net S4: 1655.36,2158.77 1643.19,2167.47 1639.78,2158.88 1644.71,2155.36
  region net VBAT+: 1835.85,2024.29 1810.01,2040.51 1802.6,2023.54 1813.21,2016.89
  region net VBAT+: 1845.44,2030.34 1845.44,2055.79 1863.75,2051.7 1863.75,2039.49
  region net +9V: 2317.98,1860.31 2289.42,1860.31 2296.63,1878.62 2308.83,1878.62
  region net C19_2: 2125.02,2144.88 2155.53,2144.88 2146.38,2126.57 2134.18,2126.57
  region net C19_1: 2069.91,2144.88 2100.43,2144.88 2091.27,2130.05 2079.07,2130.05
  region net C19_2: 2205.85,2143.23 2236.36,2143.23 2227.21,2124.92 2215.01,2124.92
  region net +9V: 2478.63,1886.97 2500.9,1886.97 2495.87,1881.9 2483.67,1881.9
  region net U7_4: 2445.59,1908.23 2465.77,1908.23 2459.71,1920.34 2451.64,1920.34
  region net U7_4: 2444.55,1947.69 2444.55,1927.51 2432.44,1933.56 2432.44,1941.63
  region net U7_4: 2445.59,1926.97 2465.77,1926.97 2459.71,1914.86 2451.64,1914.86
  region net U7_3: 2444.54,1987.69 2444.54,1967.51 2432.44,1973.56 2432.44,1981.63
  region net R27_2: 2479.67,1988.23 2499.85,1988.23 2493.79,2000.34 2485.72,2000.34
  region net U7_2: 2445.59,2086.97 2465.77,2086.97 2459.71,2074.86 2451.64,2074.86
  region net VBAT+: 2500.9,2046.97 2500.9,2068.23 2519.2,2063.7 2519.2,2051.5
  region net U7_2: 2444.55,2047.5 2444.55,2067.68 2432.44,2061.62 2432.44,2053.55
  region net U7_2: 2445.59,2068.23 2465.77,2068.23 2459.71,2080.34 2451.64,2080.34
  region net R27_2: 2479.67,2006.97 2499.85,2006.97 2493.79,1994.86 2485.72,1994.86
  region net C25_2: 1960.9,2550.12 1960.9,2565.08 1967.72,2560.59 1967.72,2554.61
  region net OSDIN: 1908.2,2568.23 1923.16,2568.23 1918.67,2577.21 1912.68,2577.21
  region net OSDIN: 1923.16,2586.97 1908.2,2586.97 1912.68,2577.99 1918.67,2577.99
  region net R19_1: 1960.9,2645.08 1960.9,2630.12 1969.88,2634.61 1969.88,2640.59
  region net X1_3: 2227.56,2310.51 2214.33,2317.51 2210.35,2309.46 2215.89,2306.53
  region net X1_1: 2273.58,2381.37 2259.61,2386.74 2254.85,2378.96 2260.96,2376.61
  region net R22_1: 2016.98,1783.74 2028.79,1783.74 2025.87,1777.44 2019.89,1777.44
  region net R21_1: 1997.29,1783.74 2009.1,1783.74 2006.19,1774.77 2000.21,1774.77
  region net R21_1: 2009.1,1848.31 1997.29,1848.31 2000.21,1853.07 2006.19,1853.07
  region net R2_2: 1969.73,1848.31 1957.92,1848.31 1960.84,1848.7 1966.82,1848.7
  region net R21_1: 2048.47,1848.31 2036.66,1848.31 2039.58,1852.75 2045.56,1852.75
  region net R22_1: 2056.35,1783.74 2068.16,1783.74 2065.24,1777.12 2059.26,1777.12
  region net R2_2: 2087.84,1848.31 2076.03,1848.31 2078.95,1856.81 2084.93,1856.81
  region net D4_2: 1928.4,1783.74 1943.36,1783.74 1938.87,1774.77 1932.88,1774.77
  region net D4_2: 1943.28,1848.31 1928.31,1848.31 1932.78,1857.28 1938.76,1857.28
  region net D4_2: 2122.1,1783.74 2137.06,1783.74 2132.57,1774.77 2126.59,1774.77
  region net D4_2: 1928.23,1881.97 1943.19,1881.97 1938.72,1872.99 1932.74,1872.99
  region net 3V3_1: 2395.72,2348.69 2416.13,2363.13 2398.28,2368.88 2390,2363.02
  region net 3V3_2: 2395.72,2275.44 2395.72,2300.44 2380.72,2292.94 2380.72,2282.94
  region net 3V3_2: 2429.73,2300.44 2429.73,2275.44 2444.73,2282.94 2444.73,2292.94
  region net +5V: 2643.74,2214.72 2613.22,2214.72 2622.38,2196.41 2634.58,2196.41
  region net 3V3_2: 2456.74,2300.34 2456.58,2275.34 2441.63,2282.94 2441.69,2292.94
  region net C19_2: 2125.02,2109.38 2155.53,2109.38 2146.38,2127.68 2134.18,2127.68
  region net C19_2: 2172.01,2081.82 2172.01,2109.38 2190.32,2101.7 2190.32,2089.49
  region net U7_2: 2185.21,2049.56 2175.01,2032.15 2188.45,2031.14 2192.66,2038.34
  region net U7_3: 2181.4,1985.51 2181.4,2005.69 2193.5,1999.63 2193.5,1991.56
  region net U7_4: 2185.06,1941.17 2175.48,1958.93 2188.93,1959.51 2192.93,1952.09
  region net C19_1: 1938.29,2082.5 1929.73,2108.69 1949.29,2107.79 1953.54,2094.78
  region net VBAT+: 1874.96,2031.82 1874.96,2059.38 1856.65,2051.7 1856.65,2039.49
  region net U7_6: 1865.57,1985.51 1865.57,2005.69 1853.46,1999.63 1853.46,1991.56
  region net 3V3_2: 1986.67,2458.08 1973.17,2458.08 1974.92,2444.79 1984.92,2444.79
  region net C25_2: 2012.26,2512.74 1998.76,2512.74 2002.52,2519.81 2008.5,2519.81
  region net 3V3_2: 2063.45,2458.08 2049.95,2458.08 2051.7,2446.57 2061.7,2446.57
  region net U4_25: 2089.04,2512.74 2075.54,2512.74 2079.3,2521.72 2085.28,2521.72
  region net U4_26: 2114.63,2499.64 2114.63,2484.68 2123.11,2496.41 2120.99,2502.75
  region net SPI_MISO2: 1909.9,2232.43 1896.4,2232.43 1900.16,2223.45 1906.14,2223.45
  region net SPI_SCK2: 1935.17,2234.47 1922.3,2230.38 1928.24,2222.85 1934.67,2224.89
  region net SPI_MOSI2: 1961.08,2287.09 1947.57,2287.09 1951.33,2296.07 1957.32,2296.07
  region net X1_1: 2037.12,2284.01 2025.1,2290.17 2032.41,2296.51 2038,2293.64
  region net X1_3: 2062.85,2284.31 2050.54,2289.87 2057.48,2296.59 2063.31,2293.95
  region net 3V3_2: 2114.63,2232.43 2101.13,2232.43 2102.88,2220.01 2112.88,2220.01
  region net 3V3_2: 2106.28,2293.65 2114.63,2270.09 2129.63,2277.59 2129.63,2287.59